# Altium PCB PCB BOTTOM.pcbdoc
Units mm, origin at the board's own origin, x right, y up, seen from the top; angles counter-clockwise.
Board outline 108.2 x 99.57 mm, 2 copper layers (Top Layer, Bottom Layer); 13 components, 32 nets, 52 pads, 0 vias.
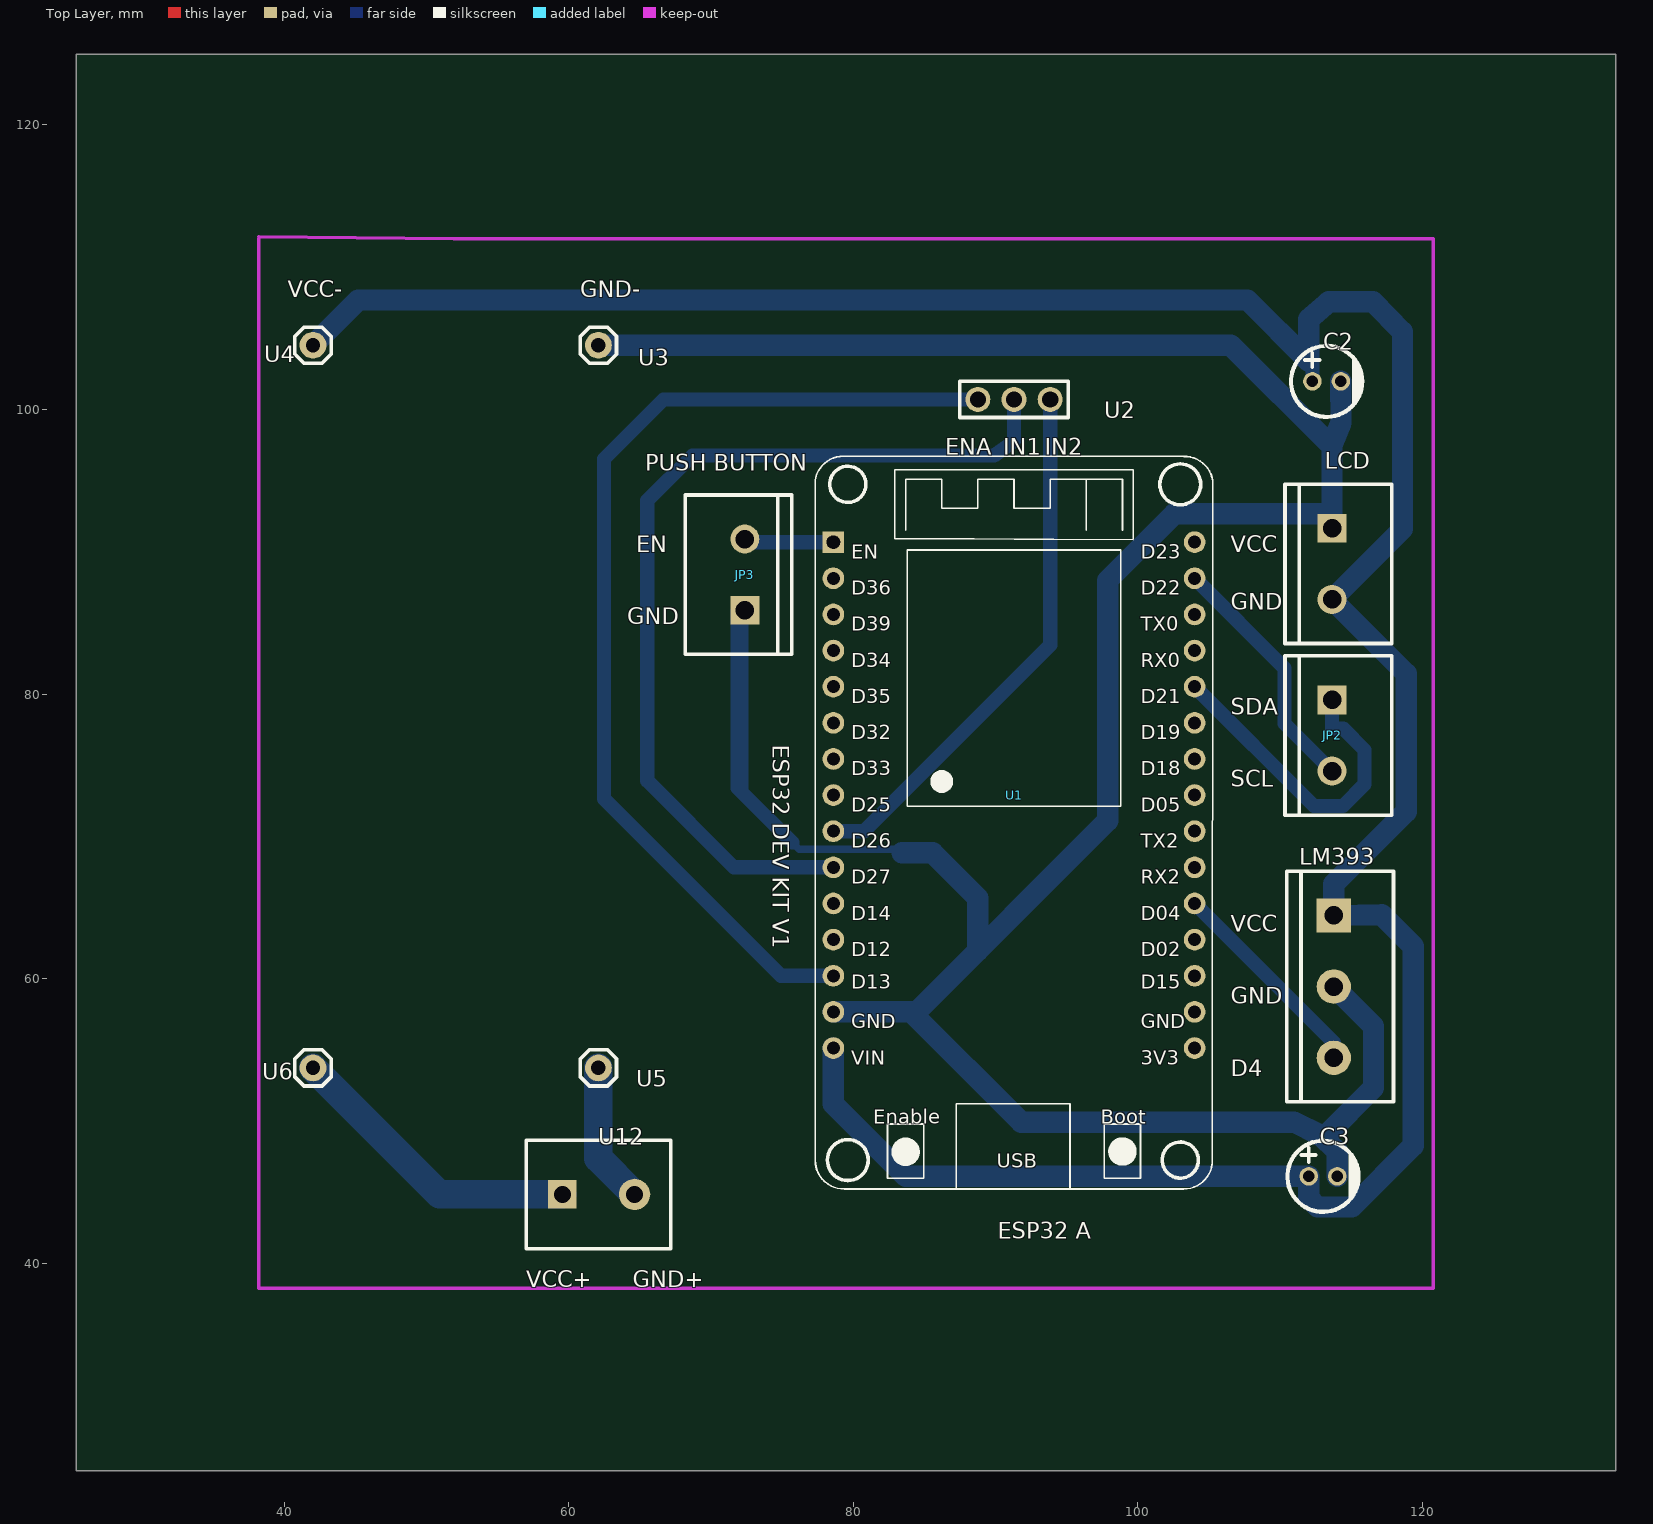
[diagram p0: Top Layer view]
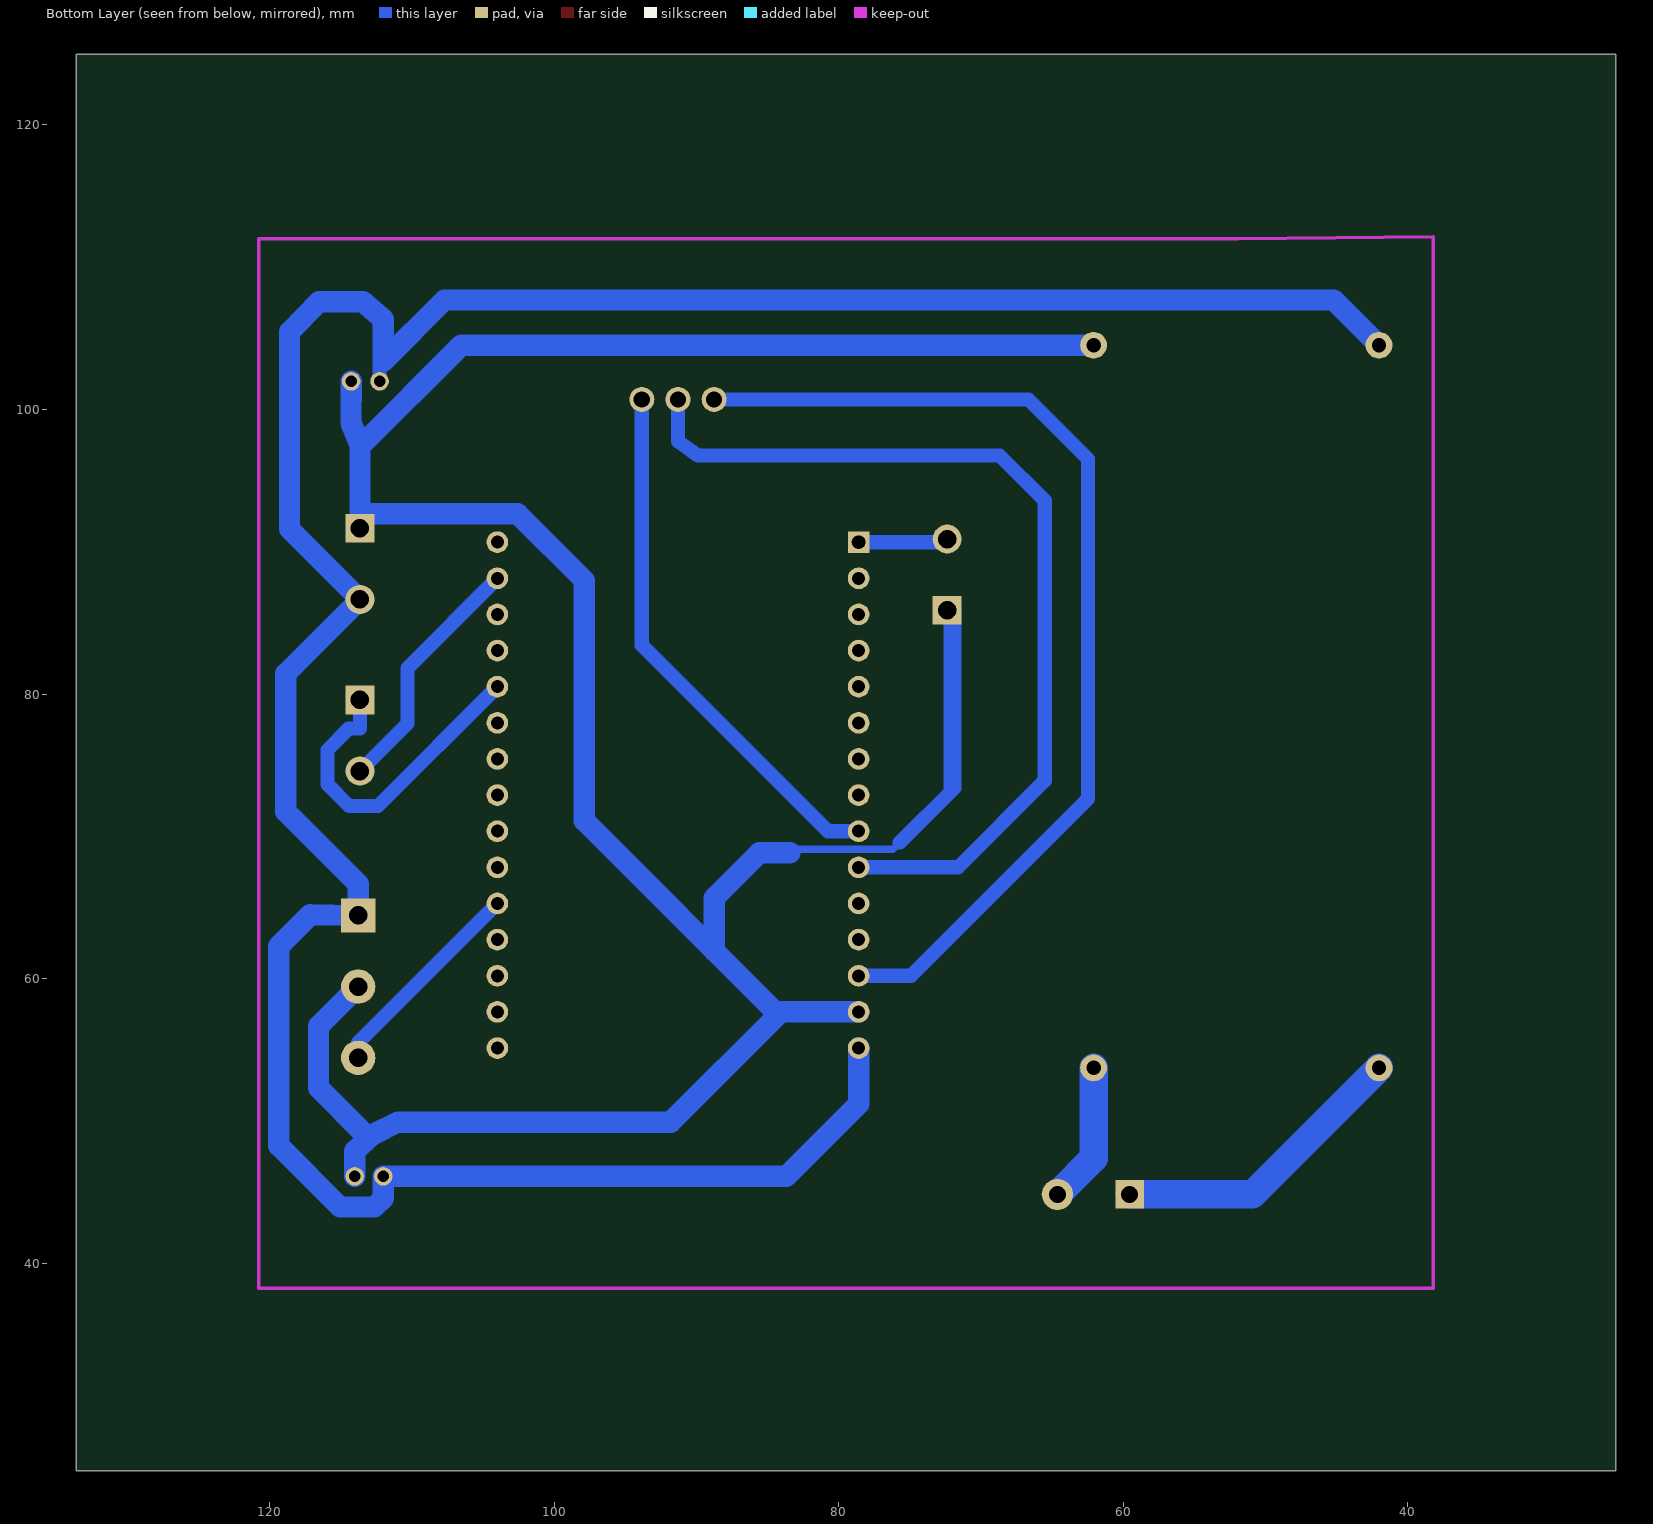
[diagram p1: Bottom Layer view, seen from below]

## Layer stack, top to bottom
Top Layer: signal copper (thickness not stored)
Dielectric: dielectric 0.32, FR-4, Dk 4.8
Bottom Layer: signal copper (thickness not stored)

## Board outline
133.604,25.4 25.4,25.4 25.4,124.968 133.604,124.968

## Components (designator, comment, footprint, x,y, rotation, side; value= is the part's Value field where it differs from the comment)
C2 "0.1uF" CAP-TH_BD5.0-P2.00-D0.8-FD 113.284,101.981 r0 top
C3 "10uF" CAP-TH_BD5.0-P2.00-D0.8-FD 113.03,46.101 r0 top
JP2 "M025MM" SCREWTERMINAL-5MM-2 113.665,77.089 r270 top
JP3 "PUSH BUTTON" SCREWTERMINAL-5MM-2 72.39,88.392 r90 top
LCD "I2C" SCREWTERMINAL-5MM-2 113.665,89.154 r270 top
LM393 "MD0369" SCREWTERMINAL-5MM-3 113.792,59.436 r270 top
U1 "ESP32 DEVKIT V1 DOIT" DOIT-ESP32-DEVKIT-V1 78.613,90.678 r0 top
U2 "L298N" 1*3_MALE_FEMALE_PIN_HEADER 91.313,104.521 r180 top
U3 "GND -" "SINGLE HEADER PIN" 62.103,104.521 r0 top
U4 "GND -" "SINGLE HEADER PIN" 42.037,104.521 r0 top
U5 "GND -" "SINGLE HEADER PIN" 62.103,53.721 r0 top
U6 "GND -" "SINGLE HEADER PIN" 42.037,53.721 r0 top
U12 "12 V" 2-PIN-TERMINAL-CONNECTOR-FOOTPRINT 62.103,44.831 r0 top

## Footprints (in the part's own frame and the unit in brackets; to place one, negate y for a bottom-side part, rotate by r counter-clockwise, add the part's x,y. Pads: shape width x height; smd on the part's side, far side on the other; paste and mask are expansions set on the pad)
1*3_MALE_FEMALE_PIN_HEADER [mm]
  round 1.75 hole 1.14: 1(-2.54,3.81) 2(0,3.81) 3(2.54,3.81)
  silkscreen extent -3.81,2.54 3.81,5.08
2-PIN-TERMINAL-CONNECTOR-FOOTPRINT [mm]
  round 2.2 hole 1.2: 1(2.54,0)
  rect 2x2 hole 1.2: 2(-2.54,0)
  silkscreen extent -5.08,-3.81 5.08,3.81
CAP-TH_BD5.0-P2.00-D0.8-FD [mm]
  round 1.3 hole 0.8: 1(-1,0) 2(1,0)
  silkscreen extent -2.5,-2.5 2.5,2.5
DOIT-ESP32-DEVKIT-V1 [mil]
  rect 60x60 hole 36 slot 37.8 at 0 deg: 1(-0.01,0.01)
  round 60 hole 36: 2(-0.01,-99.99) 3(-0.01,-199.99) 4(-0.01,-299.99) 5(-0.01,-399.99) 6(-0.01,-499.99) 7(-0.01,-599.99) 8(-0.01,-699.99) 9(-0.01,-799.99) 10(-0.01,-899.99) 11(-0.01,-999.99) 12(-0.01,-1099.99) 13(-0.01,-1199.99) 14(-0.01,-1299.99) 15(-0.01,-1399.99) 16(999.99,0.01) 17(999.99,-99.99) 18(999.99,-199.99) 19(999.99,-299.99) 20(999.99,-399.99) 21(999.99,-499.99) 22(999.99,-599.99) 23(999.99,-699.99) 24(999.99,-799.99) 25(999.99,-899.99) 26(999.99,-999.99) 27(999.99,-1099.99) 28(999.99,-1199.99) 29(999.99,-1299.99) 30(999.99,-1399.99)
  silkscreen extent -50,-1790 1050,238
SCREWTERMINAL-5MM-2 [mil]
  rect 80x80 hole 51.2: 1(-98.5,0)
  round 80 hole 51.2: 2(98.5,0)
  silkscreen extent -221,-130 221,165
SCREWTERMINAL-5MM-3 [mil]
  rect 95x95 hole 51.2: 1(-197,0)
  round 95 hole 51.2: 2(0,0) 3(197,0)
  silkscreen extent -319,-130 319,165
"SINGLE HEADER PIN" [mil]
  round 74 hole 40: 1(0,0)
  silkscreen extent -50,-50 50,50

## Nets (pads, with @x,y where several pads share a name; then routed paths per layer and width w, separated by ;. In a path a pad name is that pad's centre, name@x,y a point inside that pad or via, vN(x,y) a via of type N, cw(c..) or ccw(c..) an arc to the next point about the centre after c; other vN are vias at no path point)
U1_1: JP3.2 U1.1 | length 6.3
  Bottom Layer w1: JP3.2 72.606,90.678 U1.1
U1_2: U1.2
U1_3: U1.3
U1_4: U1.4
U1_5: U1.5
U1_6: U1.6
U1_7: U1.7
U1_8: U1.8
U1_9: U1.9 U2.1 | length 37.9
  Bottom Layer w1: U1.9 80.772,70.358 93.853,83.439 U2.1
U1_10: U1.10 U2.2 | length 65.6
  Bottom Layer w1: U1.10 71.628,67.818 65.532,73.914 65.532,93.599 68.707,96.774 89.908,96.774 91.313,97.77 U2.2
U1_11: U1.11
U1_12: U1.12
U1_13: U1.13 U2.3 | length 73.2
  Bottom Layer w1: U1.13 74.93,60.198 62.484,72.644 62.484,96.52 66.675,100.711 U2.3
U1_14: C2.2 C3.2 JP3.1 LCD.1 LM393.2 U1.14 U3.1 | length 235.6
  Bottom Layer w0.5: JP3.1 72.39,73.025 75.311,69.977 76.2,69.088 84.836,69.088 85.524,68.4 85.905,68.4
  Bottom Layer w1: JP3.1 71.882,85.89 71.882,73.406 75.725,69.563 ; LCD.1 LCD.1@113.665,92.664
  Bottom Layer w1.5: U3.1 106.553,104.521 113.665,97.409 ; 83.439,68.834 85.598,68.834 88.765,65.667 88.765,61.968 ; 113.287,49.025 116.586,52.324 116.586,56.642 LM393.2 ; 113.665,97.536 114.3,99.06 C2.2 ; 113.665,97.663 113.665,93.673 113.665,92.664 102.57,92.664 97.889,87.983 97.889,71.092 84.455,57.658 U1.14 84.074,57.658 91.821,49.911 110.998,49.911 112.786,49.022 114.041,47.876 C3.2
U1_15: C2.1 C3.1 LCD.2 LM393.1 U1.15 U4.1 | length 203.7
  Bottom Layer w1: 112.03,103.395 112.284,103.141 C2.1
  Bottom Layer w1.5: U4.1 45.212,107.696 107.729,107.696 112.029,103.396 112.029,106.352 113.444,107.569 116.55,107.569 118.618,105.456 118.618,91.605 LCD.2 118.872,81.445 118.872,71.727 113.792,66.647 LM393.1 117.157,64.491 119.38,62.268 119.38,48.26 115.062,43.942 112.649,43.942 112.029,44.562 C3.1 83.693,46.101 78.613,51.181 U1.15
U1_16: U1.16
U1_17: JP2.2 U1.17 | length 17.5
  Bottom Layer w1: U1.17 110.331,81.82 110.331,77.921 JP2.2
U1_18: U1.18
U1_19: U1.19
U1_20: JP2.1 U1.20 | length 23.4
  Bottom Layer w1: U1.20 112.395,72.136 114.427,72.136 115.951,73.66 115.951,76.073 114.45,77.574 113.665,77.574 JP2.1
U1_21: U1.21
U1_22: U1.22
U1_23: U1.23
U1_24: U1.24
U1_25: U1.25
U1_26: LM393.3 U1.26 | length 14.9
  Bottom Layer w1: U1.26 113.792,55.499 LM393.3
U1_27: U1.27
U1_28: U1.28
U1_29: U1.29
U1_30: U1.30
U12_1: U5.1 U12.1 | length 9.9
  Bottom Layer w2: U5.1 62.103,47.371 U12.1
U12_2: U6.1 U12.2 | length 21.2
  Bottom Layer w2: U6.1 50.927,44.831 U12.2

## Silkscreen, mask and mechanical layers (free items; w line width, h text height)
Top Overlay:
  text "VCC-" at 40.259,107.886 h1.14
  text "GND-" at 60.833,107.886 h1.14
  text "ENA" at 86.487,96.837 h1.14
  text "IN1" at 90.551,96.837 h1.14
  text "IN2" at 93.472,96.837 h1.14
  text "PUSH BUTTON" at 65.405,95.694 h1.14
  text "EN" at 64.77,89.98 h1.14
  text "VCC" at 106.553,89.98 h1.14
  text "GND" at 106.553,85.915 h1.14
  text "GND" at 64.135,84.9 h1.14
  text "SDA" at 106.553,78.549 h1.14
  text "ESP32 DEV KIT V1" at 74.358,76.454 h1.14 r270
  text "SCL" at 106.553,73.469 h1.14
  text "VCC" at 106.553,63.309 h1.14
  text "GND" at 106.553,58.229 h1.14
  text "D4" at 106.553,53.149 h1.14
  text "ESP32 A" at 90.17,41.719 h1.14
  text "VCC+" at 57.023,38.291 h1.14
  text "GND+" at 64.516,38.291 h1.14

## Text inside footprints (layer, text, board x,y; h text height)
U1: Top Overlay "Enable" at 81.407,49.792 h1; Top Overlay "Boot" at 97.409,49.792 h1; Top Overlay "USB" at 90.113,46.688 h1; Top Overlay "EN" at 79.883,89.518 h1; Top Overlay "D36" at 79.883,86.978 h1; Top Overlay "D39" at 79.883,84.438 h1; Top Overlay "D34" at 79.883,81.898 h1; Top Overlay "D35" at 79.883,79.358 h1; Top Overlay "D32" at 79.883,76.818 h1; Top Overlay "D33" at 79.883,74.278 h1; Top Overlay "D13" at 79.883,59.292 h1; Top Overlay "D12" at 79.883,61.578 h1; Top Overlay "D14" at 79.883,64.118 h1; Top Overlay "D27" at 79.883,66.658 h1; Top Overlay "D26" at 79.883,69.198 h1; Top Overlay "D25" at 79.883,71.738 h1; Top Overlay "D05" at 100.203,71.738 h1; Top Overlay "TX2" at 100.203,69.198 h1; Top Overlay "RX2" at 100.203,66.658 h1; Top Overlay "D04" at 100.203,64.118 h1; Top Overlay "D02" at 100.203,61.578 h1; Top Overlay "D15" at 100.203,59.292 h1; Top Overlay "D18" at 100.203,74.278 h1; Top Overlay "D19" at 100.203,76.818 h1; Top Overlay "D21" at 100.203,79.358 h1; Top Overlay "RX0" at 100.203,81.898 h1; Top Overlay "TX0" at 100.203,84.438 h1; Top Overlay "D22" at 100.203,86.978 h1; Top Overlay "D23" at 100.203,89.518 h1; Top Overlay "GND" at 100.203,56.498 h1; Top Overlay "3V3" at 100.203,53.958 h1; Top Overlay "VIN" at 79.883,53.958 h1; Top Overlay "GND" at 79.883,56.498 h1